# Altium PCB Main.PcbDoc
Units mil, origin at the board's own origin, x right, y up, seen from the top; angles counter-clockwise.
Board outline 4000 x 1800 mil, 2 copper layers (Top Layer, Bottom Layer), stack 62.8 mil thick; 59 components, 60 nets, 242 pads, 98 vias.
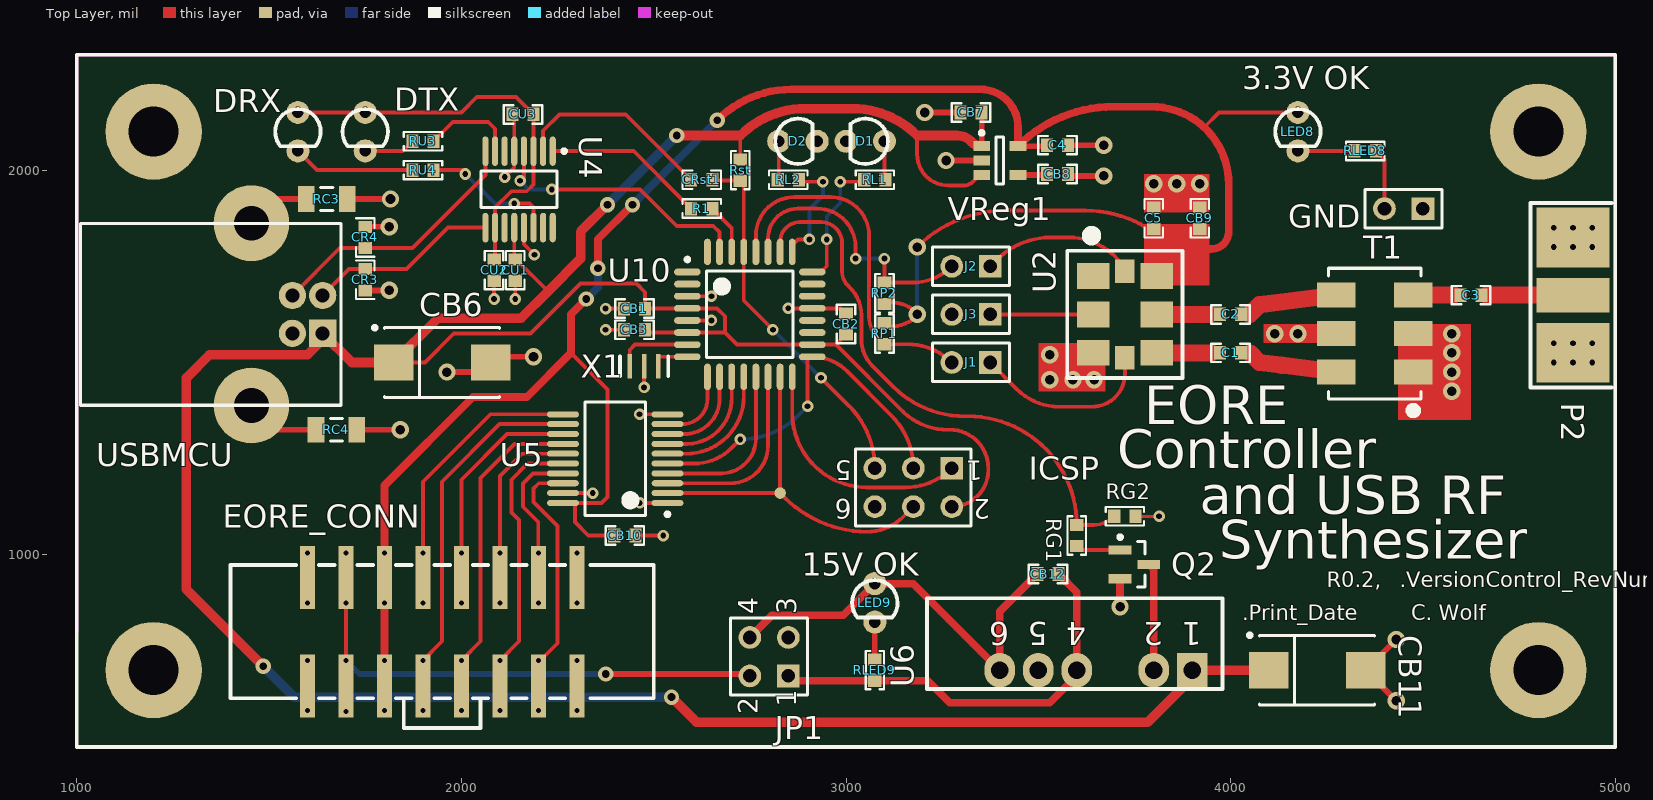
[diagram p0: Top Layer view]
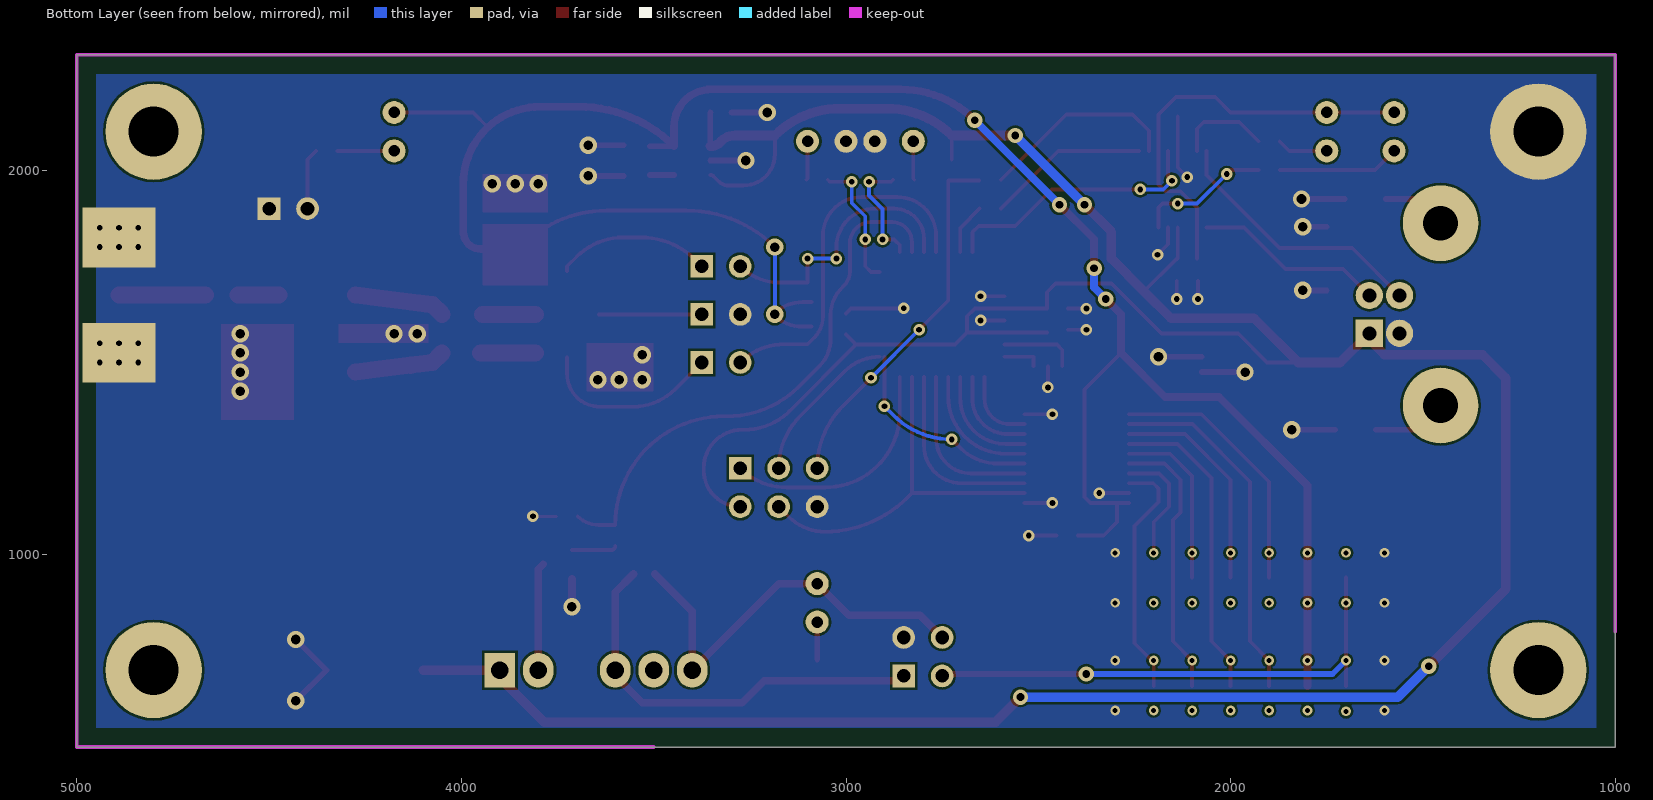
[diagram p1: Bottom Layer view, seen from below]

## Layer stack, top to bottom
Top Layer: signal copper 1.4
Dielectric: core 60, FR-4, Dk 4.8
Bottom Layer: signal copper 1.4

## Board outline
1000,500 1000,2300 5000,2300 5000,500

## Design rules (kind name [scope] priority, off if disabled: settings)
Clearance [All] p1: gap=6
FlightTimeFalling [All] p1: maximum=1.000n
FlightTimeRising [All] p1: maximum=1.000n
HoleSize [All] p1: absolutevalues=TRUE maxlimit=500 minlimit=1 maxpercent=80.000 minpercent=20.000
HoleSize Testpoint [All] p2: absolutevalues=TRUE maxlimit=100 minlimit=1 maxpercent=80.000 minpercent=20.000
HoleSize TestPointUsage [All] p3: absolutevalues=TRUE maxlimit=100 minlimit=1 maxpercent=80.000 minpercent=20.000
MinimumAnnularRing [All] p1: minimumring=5
MinimumSolderMaskSliver [All] p1 off: minsoldermaskwidth=10
MinimumSolderMaskSliver SilkscreenOverComponentPads [All] p2: minsoldermaskwidth=10
OvershootFalling [All] p1: maximum=330.0m
OvershootRising [All] p1: maximum=330.0m
ParallelSegment [All] p1 off: limit=10000 gap=10
PolygonConnect Heatsink [InNet('GND') vs InNet('GND')] p1: connectstyle=Direct reliefconductorwidth=10 reliefentries=4 polygonreliefangle="90 Angle" airgapwidth=10
PolygonConnect [All] p2: connectstyle=Relief reliefconductorwidth=10 reliefentries=4 polygonreliefangle="90 Angle" airgapwidth=10
RoomDefinition USB [InComponentClass('USB')] p1 off: confinementstyle=ConfineIn formatcopy=TRUE lockcomponents=FALSE outline 7580,2235 9580,2235 9580,3235 7580,3235
RoomDefinition Main [InComponentClass('Main')] p2 off: confinementstyle=ConfineIn formatcopy=TRUE lockcomponents=FALSE outline 7495,2125 9495,2125 9495,3125 7495,3125
RoutingVias [All] p1: holewidth=15 width=30 viastyle="Through Hole" minholewidth=15 minwidth=30 maxholewidth=250 maxwidth=500
SignalStimulus [All] p1: kind=2 level=0 starttime=10.00n stoptime=60.00n periodtime=100.00n
SilkToSilkClearance [All] p1 off: silktosilkclearance=10
SolderMaskExpansion [All] p1: expansion=4
SupplyNets [All] p1: voltage=3.300
UndershootFalling [All] p1: maximum=330.0m
UndershootRising [All] p1: maximum=330.0m
Width "Schematic Width Constraint_5" [InNet('NetC3_1')] p1: maxlimit=102.58 minlimit=7.99 preferedwidth=86.97 toplayer_minwidth=44.65 bottomlayer_maxwidth=20.16 bottomlayer_prefwidth=16.88 impedancedriven=TRUE minimp=45.000000 maximp=70.000000 favimp=50.000000
Width "Schematic Width Constraint_4" [InNet('NetC3_2')] p2: maxlimit=102.58 minlimit=7.99 preferedwidth=86.97 toplayer_minwidth=44.65 bottomlayer_maxwidth=20.16 bottomlayer_prefwidth=16.88 impedancedriven=TRUE minimp=45.000000 maximp=70.000000 favimp=50.000000
Width "Schematic Width Constraint_3" [InNet('NetC2_1')] p3: maxlimit=102.58 minlimit=7.99 preferedwidth=86.97 toplayer_minwidth=44.65 bottomlayer_maxwidth=20.16 bottomlayer_prefwidth=16.88 impedancedriven=TRUE minimp=45.000000 maximp=70.000000 favimp=50.000000
Width "Schematic Width Constraint_2" [InNet('NetC1_1')] p4: maxlimit=102.58 minlimit=7.99 preferedwidth=86.97 toplayer_minwidth=44.65 bottomlayer_maxwidth=20.16 bottomlayer_prefwidth=16.88 impedancedriven=TRUE minimp=45.000000 maximp=70.000000 favimp=50.000000
Width "Schematic Width Constraint_1" [InNet('NetC1_2')] p5: maxlimit=102.58 minlimit=7.99 preferedwidth=86.97 toplayer_minwidth=44.65 bottomlayer_maxwidth=20.16 bottomlayer_prefwidth=16.88 impedancedriven=TRUE minimp=45.000000 maximp=70.000000 favimp=50.000000
Width "Schematic Width Constraint" [InNet('NetC2_2')] p6: maxlimit=102.58 minlimit=7.99 preferedwidth=86.97 toplayer_minwidth=44.65 bottomlayer_maxwidth=20.16 bottomlayer_prefwidth=16.88 impedancedriven=TRUE minimp=45.000000 maximp=70.000000 favimp=50.000000
Width Width_General [All] p7: maxlimit=250 minlimit=6 preferedwidth=10
Width "Width Differential Pair" [(InDifferentialPairClass('All Differential Pairs'))] p8: maxlimit=31.8 minlimit=1.94 preferedwidth=22.52 toplayer_minwidth=15.8 bottomlayer_maxwidth=5.3 bottomlayer_prefwidth=3.35 impedancedriven=TRUE minimp=80.000000 maximp=100.000000 favimp=90.000000
25 further rules are at their usual default settings.

## Classes and differential pairs
component class Main: C1 C2 C3 C4 C5 CB6 CB7 CB8 CB9 CB10 CB11 CB12 EORE_CONN GND J1 J2 J3 JP1 LED8 LED9 P2 Q2 RG1 RG2 RLED8 RLED9 RP1 RP2 T1 U2 U5 U6 VReg1
component class USB: CB1 CB2 CB3 CR3 CR4 CRst1 CU1 CU2 CU3 D1 D2 DRX DTX ICSP R1 RC3 RC4 RL1 RL2 Rst RU3 RU4 U4 U10 USBMCU X1

## Components (designator, comment, footprint, x,y, rotation, side; value= is the part's Value field where it differs from the comment)
C1 "SMT Cap" 0603C 4000,1525 r0 top
C2 "SMT Cap" 0603C 4000,1625 r0 top
C3 "SMT Cap" 0603C 4625,1675 r0 top
C4 "SMT Cap" 0603C 3550,2065 r180 top
C5 "SMT Cap" 0603C 3800,1875 r270 top
CB1 "Cap Semi" 0603C 2450,1640 r0 top
CB2 "Cap Semi" 0603C 3000,1600 r270 top
CB3 "Cap Semi" 0603C 2450,1585 r0 top
CB6 "Cap Pol3" V 1950,1500 r0 top
CB7 "Cap Semi" 0603C 3325,2150 r0 top
CB8 "Cap Semi" 0603C 3550,1990 r180 top
CB9 "Cap Semi" 0603C 3920,1875 r270 top
CB10 "Cap Semi" 0603C 2425,1050 r180 top
CB11 "Cap Pol3" V 4225,700 r0 top
CB12 "Cap Semi" 0603C 3525,950 r180 top
CR3 "PGB1010603" 0603PG 1750,1715 r270 top
CR4 "PGB1010603" 0603PG 1750,1825 r90 top
CRst1 "Cap Semi" 0603C 2625,1975 r0 top
CU1 "Cap Semi" 0603C 2140,1740 r90 top
CU2 "Cap Semi" 0603C 2085,1740 r90 top
CU3 "Cap Semi" 0603C 2160,2145 r0 top
D1 "LED0" "T1 LED" 3000,2075 r270 top
D2 "LED0" "T1 LED" 2925,2075 r90 top
DRX "LED0" "T1 LED" 1575,2050 r0 top
DTX "LED0" "T1 LED" 1750,2050 r0 top
EORE_CONN "Header 8X2" "SMT 16-pin rectangular header" 1950,800 r0 top
GND "Jumper" HDR1X2 4500,1900 r180 top
ICSP "Header 3X2" HDR2X3 3275,1225 r180 top
J1 "Jumper" HDR1X2 3375,1500 r180 top
J2 "Jumper" HDR1X2 3375,1750 r180 top
J3 "Jumper" HDR1X2 3375,1625 r180 top
JP1 "Jumper - Reversing" HDR2X2 2850,685 r90 top
LED8 "LED0" "T1 LED" 4175,2050 r0 top
LED9 "LED0" "T1 LED" 3075,825 r0 top
P2 "COAX-M" "SMA Jack - PCB Edge - MultiSize" 4990,1675 r180 top
Q2 "MOSFET-N" SOT23-3N 3750,975 r0 top
R1 "Res Semi" 0603R 2625,1900 r0 top
RC3 "Res Semi" 1206R 1650,1925 r180 top
RC4 "Res Semi" 1206R 1675,1325 r180 top
RG1 "Res Semi Small" 0603R 3600,1050 r270 top
RG2 "Res Semi Small" 0603R 3725,1100 r180 top
RL1 "Res Semi Small" 0603R 3075,1975 r0 top
RL2 "Res Semi Small" 0603R 2850,1975 r180 top
RLED8 "Res Semi Small" 0603R 4350,2050 r0 top
RLED9 "Res Semi Small" 0603R 3075,700 r270 top
RP1 "Res Semi" 0603R 3100,1575 r90 top
RP2 "Res Semi" 0603R 3100,1680 r270 top
Rst "Res Semi" 0603R 2725,2000 r90 top
RU3 "Res Semi Small" 0603R 1900,2075 r0 top
RU4 "Res Semi Small" 0603R 1900,2000 r0 top
T1 "ADT4-1WT" CD542 4375,1575 r90 top
U2 "SI57x" SI57x 3725,1625 r270 top
U4 "FT230X" SOP635P600-16AN 2150,1950 r270 top
U5 "74LVC541A" SOP65P780-20AN 2400,1250 r180 top
U6 "NMF DC-DC" SIL-6(A1) 3900,700 r180 top
U10 "ATmega48A/PA/88A/PA/168A/PA/328/P" TQFP80P900X900X120-32N 2750,1625 r0 top
USBMCU "USB B Connector" "USB Connector (type B)" 1600,1625 r270 top
VReg1 "MIC5205" SOT23-5AN 3400,2025 r0 top
X1 "SMT Resonator" CSTCE_V 2475,1490 r0 top

## Footprints (in the part's own frame and the unit in brackets; to place one, negate y for a bottom-side part, rotate by r counter-clockwise, add the part's x,y. Pads: shape width x height; smd on the part's side, far side on the other; paste and mask are expansions set on the pad)
0603C [mm] "0603 Size Capacitor"
  rect 0.8x0.9 smd: 1(-0.7,0) 2(0.7,0)
  silkscreen extent -1.27,-0.61 1.27,0.61, body extent -0.87,-0.48 0.87,0.48, height 1.3
0603PG [mm]
  rect 0.8x0.9 smd: 1(-0.7,0) 2(0.7,0)
  silkscreen extent -1.27,-0.61 1.27,0.61, body extent -0.87,-0.48 0.87,0.48, height 1.3
0603R [mm]
  rect 0.8x0.9 smd: 1(-0.7,0) 2(0.7,0)
  silkscreen extent -1.27,-0.61 1.27,0.61, body extent -0.87,-0.48 0.87,0.48, height 1.3
1206R [mm] "1206 Chip Resistor"
  rect 1.1x1.7 smd: 1(-1.35,0) 2(1.35,0)
  silkscreen extent -0.4,-0.75 0.4,0.75, body extent -1.7,-0.9 1.7,0.9, height 1.3
CD542 [mm] "Mini-Circuits CD542 Package"
  rect 1.65x2.54 smd paste-0.1: 1(-2.54,-2.54) 2(0,-2.54) 3(2.54,-2.54) 4(2.54,2.54) 5(0,2.54) 6(-2.54,2.54)
  silkscreen extent -5.33,-3.05 4.32,3.05, body extent -3.94,-2.79 3.94,2.79, height 3
CSTCE_V [mm] "Murata SMT Resonator"
  rect 0.3x1.6 smd: 1(-0.95,0) 2(0,0) 3(0.95,0)
  silkscreen extent -1.6,-0.65 1.6,0.65, body extent -1.6,-0.65 1.6,0.65, height 0.9
HDR1X2 [mm] "Connector; Header; 2 Position"
  rect 1.5x1.5 hole 0.9: 1(0,0)
  round 1.5 hole 0.9: 2(2.54,0)
  silkscreen extent -1.27,-1.27 3.81,1.27, body extent -1.27,-1.27 3.81,1.27, height 6.35
HDR2X2 [mm] "Connector; Header; 2x2 Position"
  rect 1.5x1.5 hole 0.9: 1(0,0)
  round 1.5 hole 0.9: 2(0,2.54) 3(2.54,0) 4(2.54,2.54)
  silkscreen extent -1.27,-1.27 3.81,3.81
HDR2X3 [mm] "Connector; Header; 3x2 Position"
  rect 1.5x1.5 hole 0.9: 1(0,0)
  round 1.5 hole 0.9: 2(0,2.54) 3(2.54,0) 4(2.54,2.54) 5(5.08,0) 6(5.08,2.54)
  silkscreen extent -1.27,-1.27 6.35,3.81
SI57x [mm] "Silicon Labs Programmable Oscillator"
  rect 1.7x2.15 smd: 1(-2.54,-2.1) 2(0,-2.1) 3(2.54,-2.1) 4(2.54,2.1) 5(0,2.1) 6(-2.54,2.1)
  rect 1.545x1.3 smd: 7(-2.852,0) 8(2.852,0)
  silkscreen extent -5.34,-3.8 4.2,3.8, body extent -4.2,-3.8 4.2,3.8, height 1.8
SIL-6(A1) [mil] "SIL-6(A1) - Single In line Package, 6 leads, one absent"
  rect 80x90 hole 45: 1(0,0)
  oval 80x90 hole 45: 2(100,0) 4(300,0) 5(400,0) 6(500,0)
  silkscreen extent -79,-187 689,49, body extent -79,-187 689,49, height 386
"SMA Jack - PCB Edge - MultiSize" [mil] "SMA Jack - PCB Edge - MultiSize"
  rect 190x90 smd: 1(100,0)
  round 30 hole 15: 2(50,175) 2(50,125) 2(50,-125) 2(50,-175) 2(100,175) 2(100,125) 2(100,-125) 2(100,-175) 2(150,125) 2(150,175) 2(150,-175) 2(150,-125)
  rect 190x155 smd: 2(100,150) 2(100,-150)
  rect 190x155 smd far side: 2(100,150) 2(100,-150)
  silkscreen extent 0,-240 210,240, body extent -5,-245 215,245, height 180
"SMT 16-pin rectangular header" [mil]
  rect 39x164 smd: 1(-350,-141) 2(-350,141) 3(-250,-141) 4(-250,141) 5(-150,-141) 6(-150,141) 7(-50,-141) 8(-50,141) 9(50,-141) 10(50,141) 11(150,-141) 12(150,141) 13(250,-141) 14(250,141) 15(350,-141) 16(350,141)
  silkscreen extent -550,-250 550,173, body extent -550,-173 550,173, height 358
SOP65P780-20AN [mm] "SOP, 20-Leads, Body 7.2x5.3mm, Pitch 0.65mm, IPC Medium Density"
  oval 2.1x0.4 smd: 1(-3.45,2.925) 2(-3.45,2.275) 3(-3.45,1.625) 4(-3.45,0.975) 5(-3.45,0.325) 6(-3.45,-0.325) 7(-3.45,-0.975) 8(-3.45,-1.625) 9(-3.45,-2.275) 10(-3.45,-2.925) 11(3.45,-2.925) 12(3.45,-2.275) 13(3.45,-1.625) 14(3.45,-0.975) 15(3.45,-0.325) 16(3.45,0.325) 17(3.45,0.975) 18(3.45,1.625) 19(3.45,2.275) 20(3.45,2.925)
  silkscreen extent -3.57,-3.75 2,3.8, body extent -2.8,-3.75 2.8,3.75, height 2
SOP635P600-16AN [mm] "SOP, 16-Leads, Body 4.9x3.9mm, Pitch 0.635mm, IPC Medium Density"
  oval 1.95x0.4 smd: 1(-2.525,2.222) 2(-2.525,1.587) 3(-2.525,0.952) 4(-2.525,0.317) 5(-2.525,-0.318) 6(-2.525,-0.953) 7(-2.525,-1.588) 8(-2.525,-2.223) 9(2.525,-2.222) 10(2.525,-1.587) 11(2.525,-0.952) 12(2.525,-0.317) 13(2.525,0.318) 14(2.525,0.953) 15(2.525,1.588) 16(2.525,2.223)
  silkscreen extent -2.65,-2.5 1.2,3.1, body extent -1.99,-2.5 1.99,2.5, height 1.76
SOT23-3N [mm] "SOT23, 3-Leads, Body 2.9x1.3mm, Pitch 0.95mm, Lead Span 2.5mm, IPC Medium Density"
  rect 1.5x0.6 smd: 1(-0.95,0.95) 2(-0.95,-0.95) 3(0.95,0)
  silkscreen extent -1.07,-1.5 0.7,1.92, body extent -0.7,-1.5 0.7,1.5, height 1.1
SOT23-5AN [mm] "SOT23, 5-Leads, Body 2.9x1.6mm, Pitch 0.95mm, Lead Span 2.8mm, IPC Medium Density"
  rect 1.1x0.65 smd: 1(-1.2,0.95) 2(-1.2,0) 3(-1.2,-0.95) 4(1.2,-0.95) 5(1.2,0.95)
  silkscreen extent -1.32,-1.55 0.25,1.95, body extent -1.48,-1.55 1.52,1.55, height 1.45
"T1 LED" [mil]
  round 60 hole 30: 1(0,100) 2(0,0)
  silkscreen extent -59,12 59,109, body extent -59,12 59,109, height 197
TQFP80P900X900X120-32N [mm] "TQFP, 32-Leads, Body 9.3x9.3mm (max), Pitch 0.80mm, IPC Medium Density"
  oval 1.75x0.45 smd: 1(-4.125,2.8) 2(-4.125,2) 3(-4.125,1.2) 4(-4.125,0.4) 5(-4.125,-0.4) 6(-4.125,-1.2) 7(-4.125,-2) 8(-4.125,-2.8) 17(4.125,-2.8) 18(4.125,-2) 19(4.125,-1.2) 20(4.125,-0.4) 21(4.125,0.4) 22(4.125,1.2) 23(4.125,2) 24(4.125,2.8)
  oval 0.45x1.75 smd: 9(-2.8,-4.125) 10(-2,-4.125) 11(-1.2,-4.125) 12(-0.4,-4.125) 13(0.4,-4.125) 14(1.2,-4.125) 15(2,-4.125) 16(2.8,-4.125) 25(2.8,4.125) 26(2,4.125) 27(1.2,4.125) 28(0.4,4.125) 29(-0.4,4.125) 30(-1.2,4.125) 31(-2,4.125) 32(-2.8,4.125)
  silkscreen extent -4.25,-2.85 2.85,3.75, body extent -3.5,-3.5 3.5,3.5, height 1.2
"USB Connector (type B)" [mm] "USB-B right angle through hole connector (molex)"
  rect 1.8x1.8 hole 0.92: 1(1.25,1)
  round 1.8 hole 0.92: 2(-1.25,1) 3(-1.25,-1) 4(1.25,-1)
  round 5 hole 2.3: 5(-6.02,-3.71) 6(6.02,-3.71)
  silkscreen extent -6,-15 6,2.2, body extent -8.64,-15 8.64,2.2, height 11
V [mm] "Capacitor, SM Tantalum; Body 7.3 x 4.3 mm (LxW typ)"
  rect 2.6x2.4 smd: 1(-3.2,0) 2(3.2,0)
  silkscreen extent -4.57,-2.3 3.8,2.42, body extent -3.78,-2.16 3.52,2.14, height 4.15

## Part data
C1 C2 C3 C4 C5: library part "Cap - SMT Small"
CB1 CB2 CB3 CB7 CB8 CB9 CB10 CB12 CRst1 CU1 CU2 CU3: "Capacitor (Semiconductor SIM Model)"
CB6 CB11: "KEMET T520 KO-CAP  Polymer SMT Tantalum"
CR3 CR4: "PulseGuard® Lead-Free 0603 Surface Mount Polymeric ESD Suppressors"
D1 D2 DRX DTX LED8 LED9: "T 1 3/4 LED"
EORE_CONN: "Header, 8-Pin, Dual row"
GND J1 J2 J3: library part "Jumper - 2 Pin", "Jumper - 2-Pin"
ICSP: "Header, 3-Pin, Dual row"
JP1: "Reversing Jumper"
P2: "RF Coaxial PCB Connector, MMCX; Thru-Hole, Vertical Mount Plug,  50 Ohm Impedance"
Q2: "N-Channel MOSFET"
R1 RC3 RC4 RG1 RG2 RL1 RL2 RLED8 RLED9 RP1 RP2 Rst RU3 RU4: "Semiconductor Resistor"
T1: "Surface Mount RF Transformer"
U2: library part SI570, "10 MHZ TO 1.4 GHZ I2C PROGRAMMABLE XO/VCXO"
U4: "USB To Basic Serial Bridge IC"
U5: "Octal buffer/line driver with 5 V tolerant inputs/outputs; 3-state"
U6: library part "Murata NMF DC-DC", "Murata NMF DC-DC - 1W, Single output"
U10: "Atmel 8-bit Microcontroller with 4/8/16/32KBytes In-  System Programmable Flash"
USBMCU: library part "USB B connector - Through hole"
VReg1: "150mA Low-Noise LDO Regulator"
X1: "16 MHz SMT Resonator"

## Free pads (board coordinates)
  round 30 smd: 0(2828.74,1160.43)
  round 250 hole 130: 4(1200,2100) 6(4800,2100) 8(1200,700) 9(4800,700)

## Via types
v1: diameter 25, hole 13, Top Layer to Bottom Layer, tented both sides, 32 vias
v2: diameter 30, hole 15, Top Layer to Bottom Layer, tented both sides, 29 vias
v3: diameter 45, hole 25, Top Layer to Bottom Layer, tented both sides, 28 vias
v4: diameter 40, hole 20, Top Layer to Bottom Layer, tented both sides, 9 vias

## Nets (pads, with @x,y where several pads share a name; then routed paths per layer and width w, separated by ;. In a path a pad name is that pad's centre, name@x,y a point inside that pad or via, vN(x,y) a via of type N, cw(c..) or ccw(c..) an arc to the next point about the centre after c; other vN are vias at no path point)
3V3: C4.2 C5.2 CB9.2 CB10.2 EORE_CONN.5 EORE_CONN.6 LED8.1 RP1.2 RP2.2 U2.6 U5.20 VReg1.5 | length 5893.9
  Top Layer w10: 2285,1525 2380,1430 2380,1150 2364.43,1134.43 2264.58,1134.43 U5.20 2295,1134.84 2295,1085 2330,1050 CB10.2 ; RP1.2@3090,1593.15 3113.11,1593.15 ccw(c3113.11,1701.89) 3189.98,1624.98 ccw(c3113.11,1548.11) 3113.11,1656.85 RP2.2@3090,1656.85 ; v3(3184.98,1799.98) cw(c3414.38,1570.58) 3414.38,1895 3622.72,1895 cw(c3622.72,1587.72) 3840,1805 ; VReg1.5 VReg1.5@3452.4,2062.4 ; 3931.38,2111.38 3970,2150 LED8.1
  Top Layer w15: VReg1.5@3452.4,2062.4 C4.2@3509.84,2062.4
  Top Layer w20: EORE_CONN.5 EORE_CONN.6 1800,1180 2030,1410 2170,1410 2285,1525 2285,1625 v4(2325,1665) ; v4(2355,1745) 2355,1820 v4(2445,1910) ; v4(2665,2130) cw(c2858.14,1936.86) 2858.14,2210 3350,2210 cw(c3350,2112.76) 3447.24,2112.76 VReg1.5 cw(c3694.94,1814.71) 3694.94,2165 3795,2165 cw(c3795,1965) 3995,1965 3995,1840 cw(c3950,1840) 3950,1795 3915,1795
  Bottom Layer w10: v3(3185,1625) v3(3184.98,1799.98)
  Bottom Layer w20: v4(2325,1665) 2355,1695 v4(2355,1745) ; v4(2445,1910) v4(2665,2130)
  other v1: 1800,595 1800,725 1800,875 1800,1005
5V0: CB1.2 CB2.2 CB3.2 CB6.1 CB7.2 CB11.1 CU1.2 ICSP.2 Rst.2 U4.12 U6.1 U10.4 U10.6 U10.18 USBMCU.1 VReg1.1 VReg1.3 | length 8970.7
  Top Layer w10: CB6.1 1905,1500 1980,1575 2180,1575 2310,1705 2455,1705 2477.56,1682.44 CB1.2@2477.56,1640.75 ; CU1.2@2137.5,1770.06 U4.12 ; CU1.2 2142.44,1767.56 2225,1685 ; CB3.2@2477.56,1577.76 U10.6 2685,1577.76 ; CB1.2 CB1.2@2477.56,1640.75 ; Rst.2 2725,2090 ; CB2.2 2973.82,1546.26 ; 3185,2090 3185,2041.14 ccw(c3266.14,2041.14) 3266.14,1960 3305.86,1960 ccw(c3305.86,1994.14) 3330,1970 3343.95,1983.95 cw(c3352.76,1975.15) VReg1.3 ; ICSP.2 ccw(c3275,1220) 3370,1220 3370,1225 ccw(c3270,1225) 3270,1325 3265,1325 cw(c3265,1493.8) 3150.25,1370 cw(c3265,1493.8) 3145.64,1374.44 2973.82,1546.26 ; CB1.2@2477.56,1640.75 U10.4 2664.25,1640.75 2685,1620 2685,1577.76 ; 2685,1577.76 2716.5,1546.26 U10.18 2973.82,1546.26
  Top Layer w15: CB7.2 3352.76,2149.8 VReg1.1
  Top Layer w25: v4(1485,710) 1285,910 1285,1460 1345,1520 1600,1520 1639.37,1559.37 USBMCU.1 1715.16,1500 CB6.1 1939.02,1615 2155,1615 2225,1685 2310,1770 2310,1840 v4(2380,1910) ; v4(2546.22,630) 2611.22,565 3785,565 3900,680 U6.1 CB11.1 ; v4(2560,2090) 2725,2090 cw(c2894,1921) 2894,2160 3016.01,2160 cw(c3016.01,1921.01) 3185,2090 3288.79,2090 cw(c3288.79,2038.79) 3324.99,2075.01 3326.88,2073.12 ccw(c3352.76,2098.99) VReg1.1
  Bottom Layer w25: v4(1485,710) 1565,630 v4(2546.22,630) ; v4(2380,1910) v4(2560,2090)
15V: EORE_CONN.3 EORE_CONN.4 JP1.2 | length 1362.7
  Top Layer w10: EORE_CONN.3 v1(1700,725) v1(1700,875) EORE_CONN.4
  Top Layer w15: v4(2375,690) JP1.2@2740,690 ; JP1.2 2745,690 JP1.2@2740,690 ; JP1.2@2750,700 JP1.2@2740,690
  Bottom Layer w15: v1(1700,725) 1735,690 v4(2375,690)
  other v1: 1700,593 1700,1005
\RESET: CRst1.2 ICSP.5 Rst.1 U10.29 | length 959.3
  Top Layer w10: CRst1.2@2654.37,1973.19 2734.25,1973.19 U10.29 2734.25,1660.75 v2(2810,1585) ; v2(2935,1460) 3007.82,1387.18 cw(c2845.65,1225) ICSP.5
  Bottom Layer w10: v2(2810,1585) v2(2935,1460)
CS_1: U5.9 U10.9 | length 199
  Top Layer w10: U5.9 2574.57,1339.57 ccw(c2574.57,1404.76) 2639.76,1404.76 2639.76,1419.76 U10.9
CS_2: U5.8 U10.10 | length 244.9
  Top Layer w10: U5.8 2580,1313.98 ccw(c2580,1405.24) 2595.26,1315.26 ccw(c2580,1405.24) 2669.97,1389.97 ccw(c2580,1405.24) 2671.26,1405.24 U10.10
CS_3: U5.7 U10.11 | length 290.6
  Top Layer w10: U5.7 2585,1288.39 ccw(c2585,1406.14) 2611.38,1291.38 ccw(c2585,1406.14) 2699.76,1379.76 ccw(c2585,1406.14) 2702.76,1406.14 U10.11
CS_4: U5.6 U10.12 | length 334.2
  Top Layer w10: U5.6 2585,1262.8 ccw(c2585,1412.05) 2637.23,1272.23 ccw(c2585,1412.05) 2724.81,1359.81 ccw(c2585,1412.05) 2734.25,1412.05 U10.12
CS_5: U5.4 U10.13 | length 442
  Top Layer w10: U5.4 2675,1211.61 ccw(c2675,1302.36) 2707.72,1217.72 ccw(c2675,1302.36) 2759.65,1269.65 ccw(c2675,1302.36) 2765.75,1302.36 U10.13
CS_6: U5.3 U10.14 | length 496.3
  Top Layer w10: U5.3 2700,1186.02 ccw(c2700,1283.27) 2731.15,1191.15 ccw(c2700,1283.27) 2792.12,1252.12 ccw(c2700,1283.27) 2797.24,1283.27 U10.14
GND: C4.1 C5.1 CB1.1 CB2.1 CB3.1 CB6.2 CB7.1 CB8.1 CB9.1 CB10.1 CB11.2 CR3.2 CR4.2 CU1.1 CU2.1 CU3.1 D1.2 D2.2 EORE_CONN.1 EORE_CONN.2 EORE_CONN.15 EORE_CONN.16 GND.1 GND.2 ICSP.6 J3.2 JP1.3 P2.2 pad.4 Q2.2 RC3.1 RC4.1 RG2.1 RLED8.2 T1.1 T1.2 T1.5 U2.3 U4.5 U4.13 U5.1 U5.10 U5.19 U10.3 U10.5 U10.21 USBMCU.4 VReg1.2 X1.2 | length 2534.4
  Top Layer w8: RG2.1 v2(3814.13,1100)
  Top Layer w10: v2(2085,1665) CU2.1 ; v2(2112.5,1981.97) 2137.5,2006.97 U4.5 CU3.1@2137.5,2139.94 ; v2(2140,1665) CU1.1 ; U4.13 2162.5,1807.5 v2(2190,1780) ; U5.19 v2(2341.61,1160.43) ; v2(2375,1585) CB3.1 ; v2(2375,1640) CB1.1 ; CB10.1 v2(2525,1050) ; v2(2463.39,1134.84) U5.1 ; v2(2463.39,1365.16) U5.10 ; v2(2475,1435) X1.2 ; U10.5 v2(2650.04,1609.25) ; U10.3 v2(2650.04,1672.24) ; v2(2849.96,1640.75) U10.21 2986.81,1640.75 CB2.1 ; RLED8.2 4400,2027.56 GND.2
  Top Layer w15: RC3.1 v3(1815.71,1925) ; RC4.1 v3(1840.71,1325) ; CR3.2 v3(1812.56,1687.44) ; CR4.2 v3(1812.56,1852.56) ; v3(1962.44,1475) CB6.2@2075,1475 ; CB6.2@2075,1515 v3(2187.56,1515) ; v3(3204.88,2150) CB7.1 ; v3(3260.2,2025) VReg1.2 ; CB8.1@3577.56,1985 v3(3670.12,1985) ; C4.1 v3(3670.12,2065) ; v3(4430.58,620.41) CB11.2 v3(4430.58,779.59)
  Top Layer w20: v3(3712.6,865.04) Q2.2
  other v1: 1600,595 2300,595 1600,725 2300,725 1600,875 2300,875 1600,1005 2300,1005
  other v3: 4575,1425 3530,1455 3590,1455 3645,1455 4575,1475 3530,1520 4575,1525 4115,1575 4175,1575 4575,1575 3800,1965 3860,1965 3920,1965
LV_CLK: EORE_CONN.12 U5.15 | length 452.1
  Top Layer w10: EORE_CONN.12 v1(2100,1005) 2100,1205 2157.8,1262.8 U5.15
  other v1: 2100,875
LV_CS_1: EORE_CONN.14 U5.17 | length 311.8
  Top Layer w10: v1(2200,1005) 2200,1085 2160,1125 2160,1185 2186.61,1211.61 U5.17
  other v1: 2200,875
LV_CS_2: EORE_CONN.11 U5.16 | length 716.6
  Top Layer w10: EORE_CONN.11 v1(2100,725) 2150,775 2150,1090 2130,1110 2130,1195 2172.2,1237.2 U5.16
  other v1: 2100,595
LV_CS_3: EORE_CONN.9 U5.14 | length 812.5
  Top Layer w10: EORE_CONN.9 v1(2000,725) 2050,775 2050,1200 2138.39,1288.39 U5.14
  other v1: 2000,595
LV_MOSI: EORE_CONN.13 U5.18 | length 642.4
  Top Layer w10: EORE_CONN.13 2200,720 2250,770 2250,1075 2187.5,1137.5 2187.5,1172.5 2201.02,1186.02 U5.18
  other v1: 2200,595 2200,725
LV_SW_1: EORE_CONN.7 U5.12 | length 927.8
  Top Layer w10: EORE_CONN.7 v1(1900,725) 1950,775 1950,1190 2099.57,1339.57 U5.12
  other v1: 1900,595
LV_SW_2: EORE_CONN.8 U5.11 | length 685.7
  Top Layer w10: EORE_CONN.8 1900,1190 2075.16,1365.16 U5.11
  other v1: 1900,875 1900,1005
LV_SW_3: EORE_CONN.10 U5.13 | length 567.5
  Top Layer w10: EORE_CONN.10 2000,1195 2118.98,1313.98 U5.13
  other v1: 2000,875 2000,1005
NDPS: RG1.1 RG2.2 U10.26 | length 1490.1
  Top Layer w10: U10.26 2828.74,1813.74 cw(c2880,1813.74) 2880,1865 2935,1865 cw(c2935,1810) 2990,1810 2990,1736.21 ccw(c3041.21,1736.21) 3004.99,1700.01 3010.71,1694.29 cw(c2940,1623.58) 3040,1623.58 3040,1561.42 ccw(c3140,1561.42) 3069.29,1490.71 3100,1460 ; 3122.22,1437.78 3100,1460 ; RG2.2 cw(c3643.26,1154.18) 3643.26,1077.56 RG1.1 ccw(c3317.56,1077.56) 3317.56,1360 3310,1360 cw(c3310,1625.56) 3145.38,1417.18 ; 3100,1460 3122.24,1437.76 ; 3122.24,1437.76 ccw(c3310,1625.56) 3145.38,1417.18 ; 3122.24,1437.76 3130.71,1429.29 ccw(c3201.42,1500) 3145.38,1417.18
NetC1_1: C1.1 U2.4 | length 142.3
  Top Layer w44.65: U2.4 3950,1525
NetC1_2: C1.2 T1.6 | length 236.9
  Top Layer w44.65: 4050,1525 4075,1500 4132.14,1492.86 T1.6
NetC2_1: C2.1 U2.5 | length 137.3
  Top Layer w44.65: U2.5 3945,1625
NetC2_2: C2.2 T1.4 | length 236.9
  Top Layer w44.65: 4050,1625 4075,1650 4132.14,1657.14 T1.4
NetC3_1: C3.1 T1.3 | length 105
  Top Layer w44.65: T1.3 4580,1675
NetC3_2: C3.2 P2.1 | length 225
  Top Layer w44.65: C3.2@4665,1675 P2.1
NetCB8_2: CB8.2 VReg1.4 | length 62.6
  Top Layer w15: VReg1.4 CB8.2@3509.84,1987.6
NetCB12_1: CB12.1 JP1.1 RLED9.2 U6.4 | length 1092.6
  Top Layer w20: JP1.1 2862.56,672.44 RLED9.2 3212.56,672.44 3270,615 3530,615 3600,685 U6.4 3600,902.56 CB12.1
NetCB12_2: CB12.2 JP1.4 LED9.1 U6.6 | length 1091.5
  Top Layer w20: JP1.4 2807.5,842.5 2992.5,842.5 LED9.1 3175,925 U6.6 3400,852.56 CB12.2
NetCR3_1: CR3.1 U4.9 USBMCU.2 | length 496.2
  Top Layer w10: USBMCU.2 1707.72,1742.56 1857.56,1742.56 1965.59,1850.59 U4.9
NetCR4_1: CR4.1 U4.8 USBMCU.3 | length 693.5
  Top Layer w10: USBMCU.3 1683.86,1797.44 1872.44,1797.44 2062.5,1987.5 U4.8
NetD1_1: D1.1 RL1.2 | length 101.1
  Top Layer w10: D1.1 3100,1977.56 RL1.2
NetD2_1: D2.1 RL2.2 | length 101.1
  Top Layer w10: RL2.2 2825,1977.56 D2.1
NetDRX_2: DRX.2 RU4.1 | length 318.2
  Top Layer w10: DRX.2 1625,2000 RU4.1
NetDTX_2: DTX.2 RU3.1 | length 132.8
  Top Layer w10: DTX.2 1847.44,2050 RU3.1
NetJ1_1: J1.1 U2.8 | length 482.2
  Top Layer w10: J1.1 3445,1430 ; 3445.03,1429.97 ccw(c3553.64,1538.64) 3553.64,1385 3640,1385 ccw(c3640,1470) 3680,1395 ccw(c3640,1470) 3715,1430 ccw(c3640,1470) 3725,1470 U2.8
NetJ2_1: J2.1 U2.7 | length 408.9
  Top Layer w10: J2.1 3391.42,1766.42 cw(c3532.84,1625) 3391.46,1766.46 cw(c3532.84,1625) 3532.84,1825 3579.29,1825 cw(c3579.29,1654.29) 3700,1775 3725,1750 U2.7
NetJ3_1: J3.1 U2.2 | length 267.3
  Top Layer w10: J3.1 U2.2
NetLED8_2: LED8.2 RLED8.1 | length 147.4
  Top Layer w10: LED8.2 RLED8.1
NetLED9_2: LED9.2 RLED9.1 | length 97.4
  Top Layer w15: RLED9.1 LED9.2
NetQ2_1: Q2.1 RG1.2 | length 118.3
  Top Layer w10: RG1.2 ccw(c3610.04,1022.44) 3610.04,1012.4 Q2.1
NetQ2_3: Q2.3 U6.2 | length 280.2
  Top Layer w20: Q2.3 3800,962.4 U6.2
NetR1_1: R1.1 U4.1 | length 421.8
  Top Layer w10: U4.1 2448.03,2049.41 R1.1
NetRC3_2: RC3.2 USBMCU.5 | length 169
  Top Layer w15: USBMCU.5 1516.93,1925 RC3.2
NetRC4_2: RC4.2 USBMCU.6 | length 194
  Top Layer w15: USBMCU.6 1516.93,1325 RC4.2
NetRL1_1: RL1.1 U10.24 | length 342.7
  Top Layer w10: U10.24 2935.24,1735.24 2950,1750 v2(2950,1820) ; v2(2985,1970) 3042.44,1970 RL1.1
  Bottom Layer w10: v2(2950,1820) 2950,1880 2985,1915 v2(2985,1970)
NetRL2_1: RL2.1 U10.25 | length 292.7
  Top Layer w10: U10.25 2860.24,1805.24 2875,1820 v2@2900,1820 ; RL2.1 2882.56,1970 v2(2940,1970)
  Bottom Layer w10: v2(2905,1820) 2905,1898.64 2940,1933.64 v2(2940,1970)
NetU10_7: U10.7 X1.1 | length 198.3
  Top Layer w10: X1.1 2437.6,1532.6 2451.26,1546.26 U10.7
NetU10_8: U10.8 X1.3 | length 100
  Top Layer w10: X1.3 2512.4,1514.76 U10.8
"PB3 (MOSI)": ICSP.4 pad.0 U5.2 U10.15 | length 991.1
  Top Layer w10: U5.2 pad.0 ; U10.15 pad.0 ; ICSP.4 3148.89,1098.89 cw(c3055,1192.78) 3055,1060 cw(c3055,1363.77) 2840.2,1148.97 pad.0
"PB4 (MISO)": ICSP.1 U10.16 | length 632.1
  Top Layer w10: U10.16 2860.24,1369.76 ccw(c3055,1369.76) 3055,1175 3154.29,1175 ccw(c3154.29,1345.71) ICSP.1
"PB5 (SCK)": ICSP.3 U5.5 U10.17 | length 955.1
  Top Layer w10: U5.5 2605,1237.2 ccw(c2605,1375.31) 2702.62,1277.62 ccw(c2605,1375.31) 2702.65,1277.65 v2(2725,1300) ; v2(2900,1385.9) U10.17@2900,1514.76 ; U10.17 cw(c2912.4,1387.21) 3002.58,1477.42 3118.43,1361.57 cw(c2981.86,1225) ICSP.3
  Bottom Layer w10: v2(2725,1300) ccw(c2725,1515.1) 2877.1,1363 v2(2900,1385.9)
RTS: CRst1.1 U4.2 | length 526.1
  Top Layer w10: U4.2 2212.5,2102.5 2255,2145 2427.44,2145 CRst1.1
RXD: U4.4 U10.31 | length 706.6
  Top Layer w10: v2(2152.5,1972.5) 2162.5,1982.5 U4.4 ; v2(2235,1950) 2465,1950 2560,1855 2655,1855 2671.26,1838.74 U10.31
  Bottom Layer w10: v2(2152.5,1972.5) 2175,1950 v2(2235,1950)
RXLED: RU4.2 U4.14 | length 352.2
  Top Layer w10: RU4.2 2000,2000 v2(2010,1990) ; v2(2137.5,1913.03) 2176.97,1913.03 2187.5,1902.5 U4.14
  Bottom Layer w10: v2(2010,1990) 2086.97,1913.03 v2(2137.5,1913.03)
SCL: J1.2 RP1.1 U10.28 | length 934.5
  Top Layer w10: U10.28 2765.75,1830 cw(c2865.75,1830) 2865.75,1930 2960,1930 cw(c2960,1830) 3060,1830 3060,1619.18 ccw(c3136.62,1619.18) 3082.41,1565.03 ; 3082.44,1565 RP1.1 3160.47,1547.44 cw(c3160.47,1385.47) J1.2
SDA: J2.2 RP2.1 U10.27 | length 717.8
  Top Layer w10: U10.27 2797.24,1822.24 cw(c2875,1822.24) 2875,1900 2925,1900 cw(c2925,1800) 3025,1800 v2(3025,1770) ; v2(3100,1770) RP2.1 3172.54,1707.56 ccw(c3172.54,1852.46) J2.2
  Bottom Layer w10: v2(3025,1770) v2(3100,1770)
TXD: R1.2 U10.30 | length 133.4
  Top Layer w10: R1.2 2702.76,1849.8 U10.30
TXLED: RU3.2 U4.7 | length 246
  Top Layer w10: RU3.2 1977.56,2125 2070,2125 2087.5,2107.5 U4.7
U3V3: CU2.2 CU3.2 DRX.1 DTX.1 U4.3 U4.10 | length 1087.5
  Top Layer w10: DRX.1 DTX.1 2000,2150 2040,2190 2142.44,2190 2187.5,2144.94 U4.3 2187.5,1962.5 2170,1945 2130,1945 2087.5,1902.5 U4.10 CU2.2@2087.5,1770.06
pads on no net: U2.1 U4.6 U4.11 U4.15 U4.16 U6.5 U10.1 U10.2 U10.19 U10.20 U10.22 U10.23 U10.32

## Polygon pours and split planes (outlines as drawn)
GND on Bottom Layer "Gnd" (solid, pour order 2): 1050,550 4950,550 4950,2250 1050,2250 1050,586.96 1050,550

## Keep-outs
Keep-Out Layer:
  lines w10: 1000,800 1000,2300 5000,2300 5000,500 3500,500

## Other copper
Top Layer:
  region net GND: 3945,1890 3945,1990 3775,1990 3775,1890
  rectangle net GND: 3500,1425 3675,1550
  region net 3V3: 3945,1860 3775,1860 3775,1700 3945,1700
  rectangle net GND: 4085,1550 4320,1600
  rectangle net GND: 4435,1350 4625,1600

## Silkscreen, mask and mechanical layers (free items; w line width, h text height)
Top Overlay:
  lines w10: 1000,500 3500,500 5000,500 5000,2300 1000,2300 1000,800 1000,500
  text "3.3V OK" at 4030,2210 h60
  text "EORE" at 3775,1340 h100
  text "Controller" at 3705,1225 h100
  text "and USB RF" at 3920,1105 h100
  text "Synthesizer" at 3970,990 h100
  text "15V OK" at 2885,945 h60
  text "R0.2," at 4250,915 h40
  text ".VersionControl_RevNumber" at 4440,915 h40
  text ".Print_Date" at 4030,830 h40
  text "C. Wolf" at 4470,830 h40

## Dimensions
1000,1260.83 to 1000,500 on Mechanical 1

## Text inside footprints (layer, text, board x,y; h text height)
ICSP: Top Overlay "1" at 3355,1245 h50 r180; Top Overlay "2" at 3375,1145 h50 r180; Top Overlay "5" at 3015,1245 h50 r180; Top Overlay "6" at 3015,1145 h50 r180
JP1: Top Overlay "1" at 2870,605 h50 r90; Top Overlay "2" at 2770,585 h50 r90; Top Overlay "4" at 2770,845 h50 r90; Top Overlay "3" at 2870,845 h50 r90
P2: Mechanical 1 "Board Edge" at 5060,1945 h60 r270
U6: Top Overlay "1" at 3925,825 h60 r180; Top Overlay "2" at 3825,825 h60 r180; Top Overlay "5" at 3525,825 h60 r180; Top Overlay "6" at 3425,825 h60 r180; Top Overlay "4" at 3625,825 h60 r180